# Altium PCB RL02.PcbDoc
Units mm, origin at the board's own origin, x right, y up, seen from the top; angles counter-clockwise.
Board outline 43 x 71 mm, 2 copper layers (Top Layer, Bottom Layer); 93 components, 57 nets, 282 pads, 132 vias.
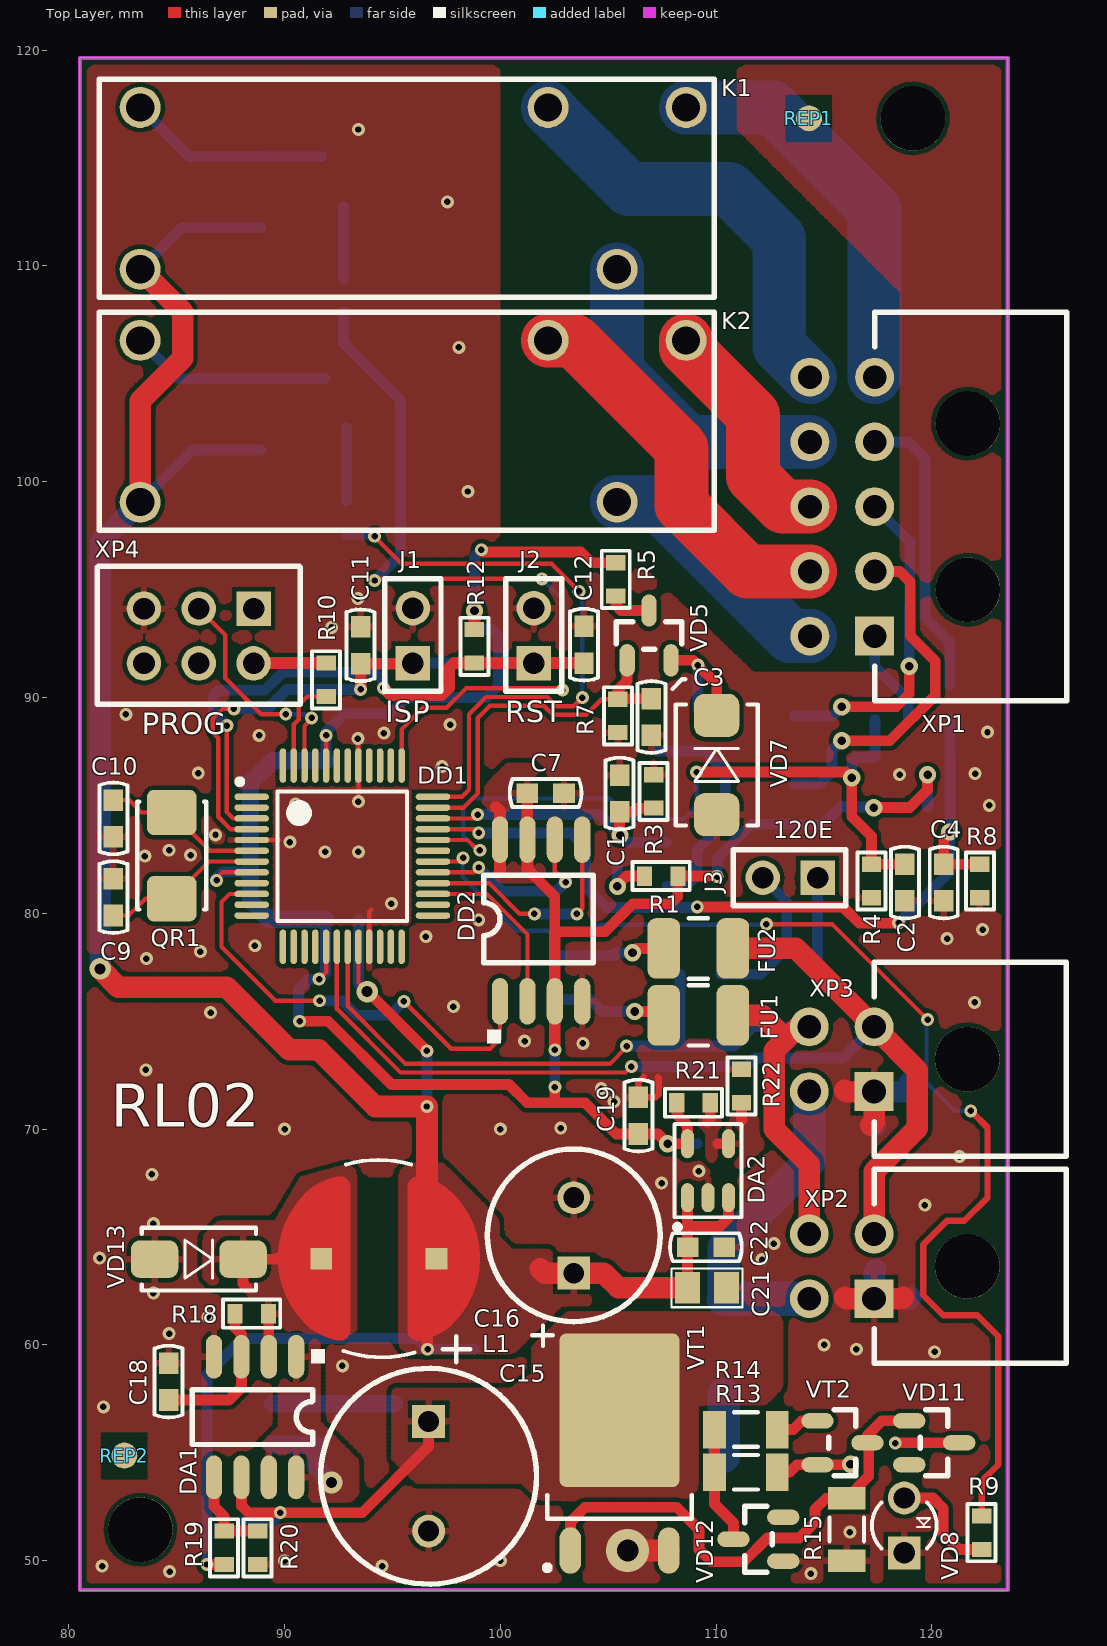
[diagram p0: Top Layer view]
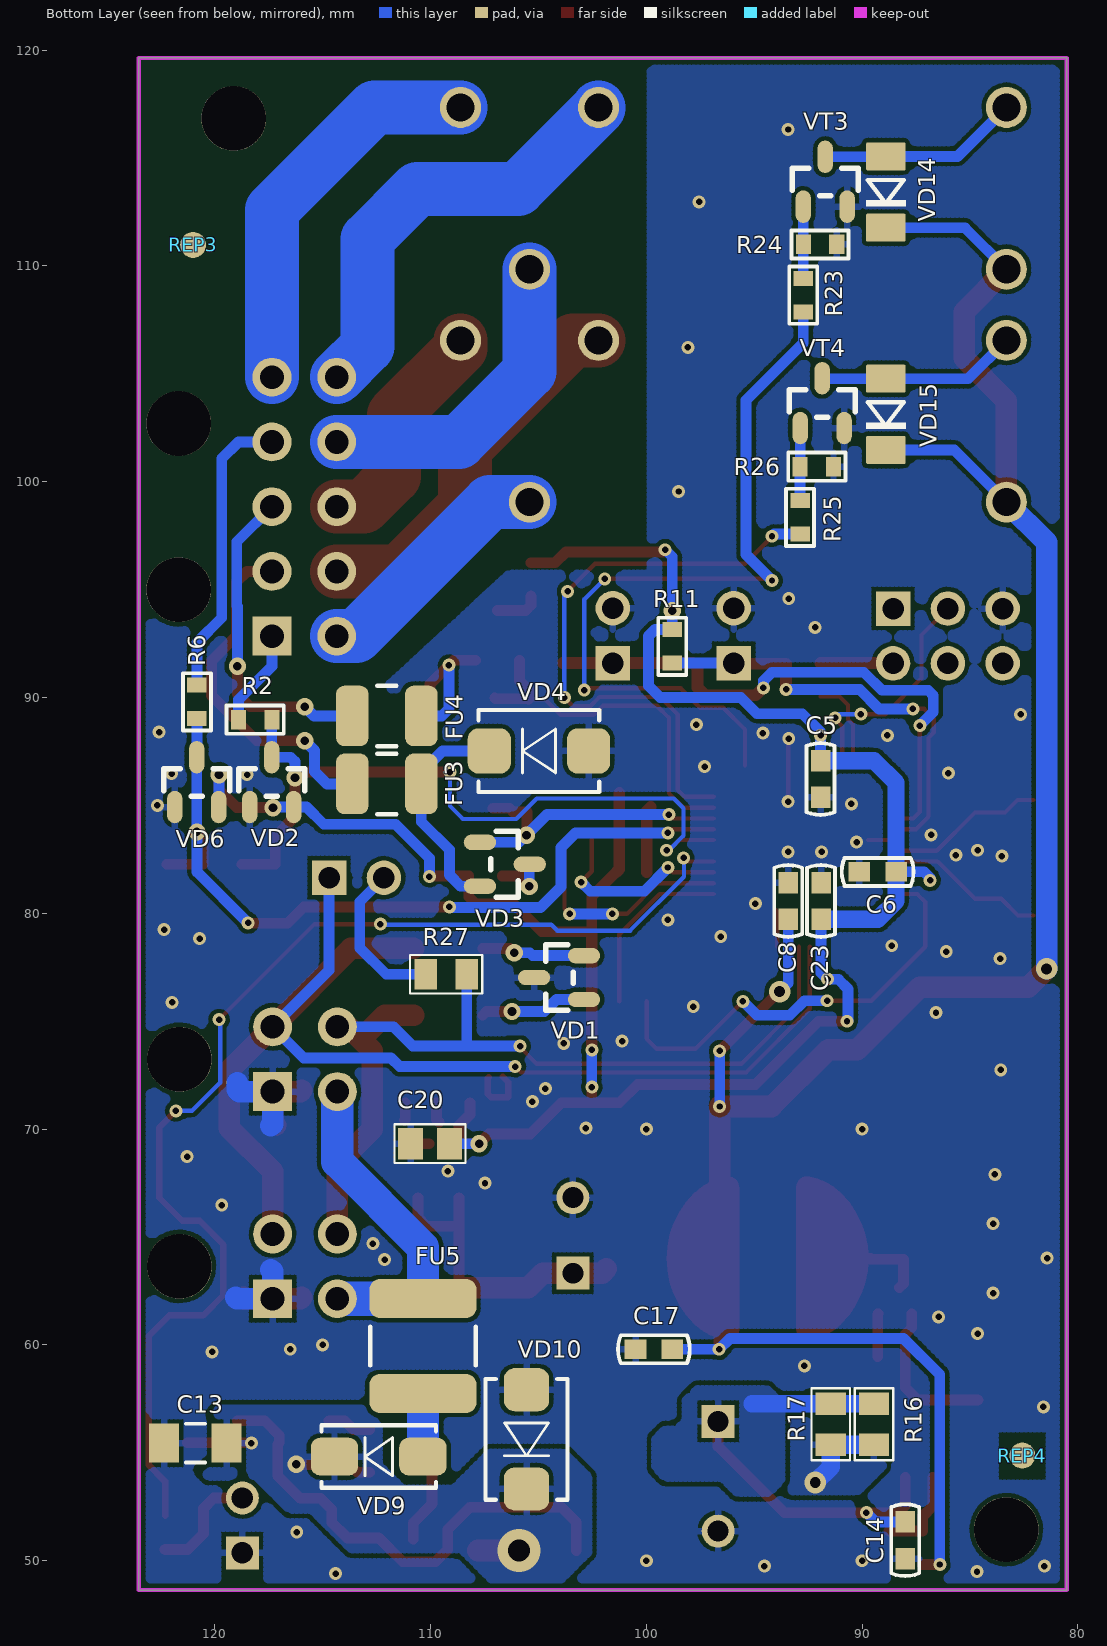
[diagram p1: Bottom Layer view, seen from below]

## Layer stack, top to bottom
Top Solder: solder mask 0.0102, Solder Resist, Dk 3.5
Top Layer: signal copper 0.0356
Dielectric 1: dielectric 0.32, FR-4, Dk 4.8
Bottom Layer: signal copper 0.0356
Bottom Solder: solder mask 0.0102, Solder Resist, Dk 3.5

## Board outline
80.518,48.641 80.518,119.641 123.518,119.641 123.518,48.641

## Design rules (kind name [scope] priority, off if disabled: settings)
Clearance [All] p1: gap=0.2 ignorepadtopadclearanceinfootprint=FALSE
HoleSize [All] p1: absolutevalues=TRUE maxlimit=7 minlimit=0.025 maxpercent=80.000 minpercent=20.000
MinimumSolderMaskSliver [All] p1: minsoldermaskwidth=0.1
PolygonConnect PolygonConnect_1 [IsVia OR InComponent('VT1') AND InNet('VIN_F')] p1: connectstyle=Direct reliefconductorwidth=0.254 reliefentries=4 polygonreliefangle="90 Angle" airgapwidth=0.254
PolygonConnect [All] p2: connectstyle=Relief reliefconductorwidth=0.3 reliefentries=4 polygonreliefangle="90 Angle" airgapwidth=0.2
RoutingVias [All] p1: holewidth=0.4 width=0.8 viastyle="Through Hole" minholewidth=0.3 minwidth=0.6 maxholewidth=1 maxwidth=2
SolderMaskExpansion [All] p1: expansion=0.102
Width [All] p1: maxlimit=3 minlimit=0.2 preferedwidth=0.5
28 further rules are at their usual default settings.

## Classes and differential pairs
component class Relays: K1 K2 R23 R24 R25 R26 VD14 VD15 VT3 VT4
component class Power: C13 C14 C15 C16 C17 C18 C19 C20 C21 C22 DA1 DA2 FU5 L1 R13 R14 R15 R16 R17 R18 R19 R20 R21 R22 VD9 VD10 VD11 VD12 VD13 VT1 VT2
component class MCU: C5 C6 C7 C8 C9 C10 C11 C12 C23 DD1 DD2 J1 J2 QR1 R9 R10 R11 R12 REP1 REP2 REP3 REP4 VD8 XP4
component class Inputs: C1 C2 C3 C4 FU3 FU4 R1 R2 R3 R4 R5 R6 R7 R8 VD2 VD3 VD4 VD5 VD6 VD7
component class Connections: FU1 FU2 J3 R27 VD1 XP1 XP2 XP3

## Components (designator, comment, footprint, x,y, rotation, side; value= is the part's Value field where it differs from the comment)
C1 "0.1uF" CC0603 105.525,85.55 r270 top
C2 "0.1uF" CC0603 118.75,81.425 r90 top
C3 "0.1uF" CC0603 107,89.1 r90 top
C4 "0.1uF" CC0603 120.55,81.425 r90 top
C5 "0.1uF" CC0603 91.925,86.225 r90 bottom
C6 "0.1uF" CC0603 89.275,81.925 r0 bottom
C7 "0.1uF" CC0603 102.1,85.575 r180 top
C8 "0.1uF" CC0603 93.425,80.577 r270 bottom
C9 "22pF" CC0603 82.069,80.75 r270 top
C10 "22pF" CC0603 82.069,84.4 r90 top
C11 "200pF" CC0603 93.525,92.425 r270 top
C12 "200pF" CC0603 103.875,92.45 r270 top
C13 "0.1uF" CC1206 120.9,55.45 r180 bottom
C14 "0.1uF" CC0603 88,50.95 r90 bottom
C15 "470uFx35V" CC16X10_CAP0.5(1)(Primary) 96.675,56.455 r270 top
C16 "1000uFx6.3V" CC8X3.5 103.4,63.325 r90 top
C17 "0.1uF" CC0603 99.65,59.8 r180 bottom
C18 "300pF" CC0603 84.625,58.3 r270 top
C19 "0.1uF" CC0603 106.4,70.625 r90 top
C20 "10uFx6.3V" CC0805 110.025,69.325 r180 bottom
C21 "4.7uF 6.3V" CC0805 109.575,62.65 r180 top
C22 "0.1uF" CC0603 109.525,64.525 r0 top
C23 "0.1uF" CC0603 91.9,80.575 r90 bottom
DA1 "MC34063" SO-8 90.54,59.45 r180 top
DA2 "AP2210K-ADJTRG1" SOT23-5 109.625,68.075 r90 top
DD1 "LPC11C24FBD48" LQFP-48 92.675,82.65 r0 top
DD2 "M25PE16" EIAJ_SO8 99.985,75.925 r90 top
FU1 "MICROSMD010F-2" RC1210 109.175,75.275 r0 top
FU2 "MICROSMD010F-2" RC1210 109.175,78.375 r0 top
FU3 "MICROSMD010F" RC1210 112.025,86 r180 bottom
FU4 "MICROSMD010F" RC1210 112.025,89.15 r180 bottom
FU5 "MF-SMDF050" MF-SMDF 110.35,59.95 r270 bottom
J1 "PLS-02" PLS-02 95.95,91.6 r90 top
J2 "PLS-02" PLS-02 101.55,91.6 r90 top
J3 "PLS-02" PLS-02 114.7,81.65 r180 top
K1 "RY21" RY21_RY21(Primary) 83.312,117.348 r0 top
K2 "RY21" RY21_RY21(Primary) 83.312,106.553 r0 top
L1 "220uH" SDR0805 94.375,64 r180 top
QR1 "NX5032GA-12.000MHz LN-CD-1" AC5032_2 84.769,82.675 r270 top
R1 "4k7" RC0603 107.45,81.725 r0 top
R2 "100k" RC0603 118.125,88.975 r180 bottom
R3 "100k" RC0603 107.1,85.65 r270 top
R4 "10k" RC0603 117.2,81.5 r90 top
R5 "4k7" RC0603 105.35,95.476 r90 top
R6 "100k" RC0603 120.825,89.8 r270 bottom
R7 "100k" RC0603 105.45,89.15 r90 top
R8 "10k" RC0603 122.225,81.5 r90 top
R9 "390E" RC0603 122.3,51.3 r270 top
R10 "100E" RC0603 91.925,90.825 r90 top
R11 "10k" RC0603 98.8,92.375 r90 bottom
R12 "10k" RC0603 98.8,92.375 r90 top
R13 "220k" RC1206 111.375,54.1 r0 top
R14 "220k" RC1206 111.375,56.075 r0 top
R15 "220k" RC1206 116.05,51.45 r270 top
R16 "1E" RC0805 89.45,56.325 r90 bottom
R17 "1E" RC0805 91.45,56.325 r90 bottom
R18 "560k" RC0603 88.475,61.45 r180 top
R19 "3k 1%" RC0603 87.2,50.6 r90 top
R20 "1k 1%" RC0603 88.75,50.6 r90 top
R21 "11k 1%" RC0603 108.95,71.225 r180 top
R22 "18k 1%" RC0603 111.175,72 r270 top
R23 "4k7" RC0603 92.725,108.65 r90 bottom
R24 "47k" RC0603 91.95,111 r0 bottom
R25 "4k7" RC0603 92.875,98.35 r90 bottom
R26 "47k" RC0603 92.1,100.7 r0 bottom
R27 "120E" RC0805 109.275,77.175 r180 bottom
REP1 "REPER_POINT_1.2" REPER1.2 114.3,116.84 r90 top
REP2 "REPER_POINT_1.2" REPER1.2 82.575,54.875 r90 top
REP3 "REPER_POINT_1.2" REPER1.2 121,110.975 r90 bottom
REP4 "REPER_POINT_1.2" REPER1.2 82.575,54.875 r90 bottom
VD1 "PESD2CAN" SOT-23(123) 102.876,76.009 r180 bottom
VD2 "BAT54S" SOT-23(GSD) 118.375,84.912 r180 bottom
VD3 "BAT54A" SOT-23(123) 107.724,83.291 r0 bottom
VD4 "P6SMBJ28A" SMB 104.975,87.525 r180 bottom
VD5 "BAT54A" SOT-23(123) 105.875,91.712 r270 top
VD6 "BAT54S" SOT-23(GSD) 121.85,84.912 r180 bottom
VD7 "P6SMBJ28A" SMB 110.025,86.875 r270 top
VD8 "BL-B45V1-L" LED3 118.718,50.366 r90 top
VD9 "GS1M" SMA 112.4,54.825 r0 bottom value={Value}
VD10 "SMBJ150A" SMB 105.55,55.625 r90 bottom
VD11 "BZX84C15" SOT-23(123) 118.937,56.482 r180 top value={Value}
VD12 "BZX84C39" SOT-23(123) 113.124,49.984 r0 top value={Value}
VD13 "SS14" SMA 86.025,63.975 r0 top
VD14 "LL4148" SOD-80 88.9,113.425 r90 bottom
VD15 "LL4148" SOD-80 88.9,103.126 r90 bottom
VT1 "FQD5P20TM" D-PAK(TO-252AA) 105.525,54.975 r90 top
VT2 "BC807-40" SOT-23(123) 114.687,56.482 r180 top
VT3 "BC817-40" SOT-23(123) 92.725,112.737 r270 bottom value={Value}
VT4 "BC817-40" SOT-23(123) 92.866,102.476 r270 bottom value={Value}
XP1 "MIF2X05PRP" MIF2X05PRP 117.346,92.846 r0 top
XP2 "MIF2X02PRP" MIF2X02PRP 117.318,62.141 r0 top
XP3 "MIF2X02PRP" MIF2X02PRP 117.318,71.741 r0 top
XP4 "PLD-06" PIN6 88.565,94.125 r180 top

## Footprints (in the part's own frame and the unit in brackets; to place one, negate y for a bottom-side part, rotate by r counter-clockwise, add the part's x,y. Pads: shape width x height; smd on the part's side, far side on the other; paste and mask are expansions set on the pad)
AC5032_2 [mm]
  rrect30% 2.1x2.3 smd mask+0.076: 1(-2,0) 2(2,0)
  silkscreen extent -2.5,-1.6 2.5,1.6
CC8X3.5 [mil]
  rect 60x60 hole 38 mask+2.99: 1(0,0)
  round 60 hole 38 mask+2.99: 2(137.8,0)
  silkscreen extent -89,-157 226,157
CC16X10_CAP0.5(1)(Primary) [mil]
  round 60 hole 38 mask+2.99: 1(200,0)
  rect 60x60 hole 38 mask+2.99: 2(0,0)
  silkscreen extent -97,-197 297,197
CC0603 [mm]
  rect 1x0.9 smd paste-25.4 mask+0.076: 1(-0.85,0) 2(0.85,0)
  silkscreen extent -1.66,-0.65 1.66,0.65
CC0805 [mm]
  rect 1.15x1.45 smd paste-25.4 mask+0.076: 1(-0.9,0) 2(0.9,0)
  silkscreen extent -1.65,-0.9 1.65,0.9
CC1206 [mm]
  rect 1.4x1.8 smd paste-25.4 mask+0.076: 1(-1.45,0) 2(1.45,0)
  silkscreen extent -0.45,-0.9 0.45,0.9
D-PAK(TO-252AA) [mm]
  oval 2.15x1 smd paste+0.076 mask+0.076: 1(-4.5,2.28) 3(-4.5,-2.28)
  rrect10% 7.1x5.55 smd paste-4 mask+0.076: 2(2,0)
  silkscreen extent -5.42,-3.35 -1.92,3.47
EIAJ_SO8 [mil]
  oval 85x29.53 smd mask+2.99: 1(0,0) 2(0,-50) 3(0,-100) 4(0,-150) 5(295,-150) 6(295,-100) 7(295,-50) 8(295,0)
  silkscreen extent -77,-170 230,30
LED3 [mil]
  rect 60x60 hole 39 mask+2.99: 1(0,0)
  round 60 hole 39 mask+2.99: 2(100,0)
  silkscreen extent 8,-59 92,59
LQFP-48 [mm]
  oval 1.6x0.3 smd mask+0.076: 1(-4.2,2.75) 2(-4.2,2.25) 3(-4.2,1.75) 4(-4.2,1.25) 5(-4.2,0.75) 6(-4.2,0.25) 7(-4.2,-0.25) 8(-4.2,-0.75) 9(-4.2,-1.25) 10(-4.2,-1.75) 11(-4.2,-2.25) 12(-4.2,-2.75) 25(4.2,-2.75) 26(4.2,-2.25) 27(4.2,-1.75) 28(4.2,-1.25) 29(4.2,-0.75) 30(4.2,-0.25) 31(4.2,0.25) 32(4.2,0.75) 33(4.2,1.25) 34(4.2,1.75) 35(4.2,2.25) 36(4.2,2.75)
  oval 0.3x1.6 smd mask+0.076: 13(-2.75,-4.2) 14(-2.25,-4.2) 15(-1.75,-4.2) 16(-1.25,-4.2) 17(-0.75,-4.2) 18(-0.25,-4.2) 19(0.25,-4.2) 20(0.75,-4.2) 21(1.25,-4.2) 22(1.75,-4.2) 23(2.25,-4.2) 24(2.75,-4.2) 37(2.75,4.2) 38(2.25,4.2) 39(1.75,4.2) 40(1.25,4.2) 41(0.75,4.2) 42(0.25,4.2) 43(-0.25,4.2) 44(-0.75,4.2) 45(-1.25,4.2) 46(-1.75,4.2) 47(-2.25,4.2) 48(-2.75,4.2)
  silkscreen extent -4.87,-3 3,3.57
MF-SMDF [mm]
  rrect50% 1.8x4.95 smd mask+0.076: 1(-2.2,0) 2(2.2,0)
  silkscreen extent -0.9,-2.45 0.9,2.45
MIF2X02PRP [mm]
  rect 1.8x1.8 hole 1.1 mask+0.076: 1(0,0)
  round 1.8 hole 1.1 mask+0.076: 2(0,3) 3(-3,0) 4(-3,3)
  round 3 hole 3 unplated mask+0.076: 5(4.32,1.5)
  silkscreen extent 0,-3 8.9,6
MIF2X05PRP [mm]
  rect 1.8x1.8 hole 1.1 mask+0.076: 1(0,0)
  round 1.8 hole 1.1 mask+0.076: 2(0,3) 3(0,6) 4(0,9) 5(0,12) 6(-3,0) 7(-3,3) 8(-3,6) 9(-3,9) 10(-3,12)
  round 3 hole 3 unplated mask+0.076: 11(4.32,2.15) 12(4.32,9.85)
  silkscreen extent 0,-3 8.9,15
PIN6 [mm]
  rect 1.6x1.6 hole 1 mask+0.076: 1(0,0)
  round 1.6 hole 1 mask+0.076: 2(0,2.54) 3(2.54,0) 4(2.54,2.54) 5(5.08,0) 6(5.08,2.54)
  silkscreen extent -2.16,-1.96 7.24,4.45
PLS-02 [mm]
  rect 1.6x1.6 hole 1 mask+0.076: 1(0,0)
  round 1.6 hole 1 mask+0.076: 2(2.54,0)
  silkscreen extent -1.3,-1.3 3.9,1.3
RC0603 [mm]
  rect 0.7x0.9 smd paste-25.4 mask+0.076: 1(-0.775,0) 2(0.774,0)
  silkscreen extent -1.32,-0.65 1.33,0.65
RC0805 [mm]
  rect 1.05x1.4 smd paste-25.4 mask+0.076: 1(-0.95,0) 2(0.95,0)
  silkscreen extent -1.67,-0.89 1.67,0.89
RC1206 [mm]
  rect 1.05x1.75 smd paste-25.4 mask+0.076: 1(-1.45,0) 2(1.45,0)
  silkscreen extent -0.55,-0.8 0.55,0.8
RC1210 [mm]
  rrect50% 1.5x2.8 smd mask+0.076: 1(-1.6,0) 2(1.6,0)
  silkscreen extent -0.45,-1.4 0.45,1.4
REPER1.2 [mm]
  round 1.2 smd paste-25.4 mask+0.076: 1(0,0)
  Top Layer pour cut-out: -1.35,-1.325 1.325,-1.325 1.325,1.325 -1.35,1.325
RY21_RY21(Primary) [mm]
  round 1.9 hole 1.3 mask+0.076: 1(0,-7.5) 2(0,0) 11(22.1,-7.5) 12(18.9,0) 14(25.3,0)
  silkscreen extent -1.9,-8.8 26.6,1.3
SDR0805 [mm]
  rect 1x1 smd paste-25.4 mask+0.076: 1(-2.667,0) 2(2.667,0)
  Top Layer region: -1.327,3.319 -1.362,3.503 -1.461,3.66 -1.612,3.771 -1.792,3.818 -1.977,3.797 -2.318,3.69 -2.706,3.535 -3.065,3.321 -3.387,3.053 -3.392,3.047 -3.771,2.627 -4.09,2.16 -4.345,1.654 -4.53,1.119 -4.642,0.565 -4.68,0 -4.642,-0.565 -4.53,-1.119 -4.345,-1.654 -4.09,-2.16 -3.771,-2.627 -3.392,-3.047 -3.381,-3.059 -3.063,-3.323 -2.709,-3.534 -2.325,-3.688 -1.996,-3.791 -1.806,-3.813 -1.62,-3.764 -1.465,-3.65 -1.363,-3.488 -1.327,-3.299
  Top Layer region: 1.327,-3.319 1.362,-3.503 1.461,-3.66 1.612,-3.771 1.792,-3.818 1.977,-3.797 2.318,-3.69 2.706,-3.535 3.065,-3.321 3.387,-3.053 3.392,-3.047 3.771,-2.627 4.09,-2.16 4.345,-1.654 4.53,-1.119 4.642,-0.565 4.68,0 4.642,0.565 4.53,1.119 4.345,1.654 4.09,2.16 3.771,2.627 3.392,3.047 3.381,3.059 3.063,3.323 2.709,3.534 2.325,3.688 1.996,3.791 1.806,3.813 1.62,3.764 1.465,3.65 1.363,3.488 1.327,3.299
  silkscreen extent -1.66,-4.57 1.64,4.57
SMA [mm]
  rrect50% 2.2x1.75 smd mask+0.076: 1(-2.05,0) 2(2.05,0)
  silkscreen extent -2.65,-1.45 2.65,1.45
SMB [mm]
  rrect50% 2x2.1 smd mask+0.076: 1(2.3,0) 2(-2.3,0)
  silkscreen extent -2.8,-1.9 2.8,1.9
SO-8 [mil]
  oval 29.53x80 smd mask+2.99: 1(0,0) 2(50,0) 3(100,0) 4(150,0) 5(150,220) 6(100,220) 7(50,220) 8(0,220)
  silkscreen extent -52,-14 190,160
SOD-80 [mm]
  rrect10% 1.3x1.83 smd paste-25.4 mask+0.076: 1(1.651,0) 2(-1.651,0)
  silkscreen extent -0.66,-0.91 0.56,0.91
SOT23-5 [mm]
  oval 1.35x0.6 smd mask+0.076: 1(-1.25,0.95) 2(-1.25,0) 3(-1.25,-0.95) 4(1.25,-0.95) 5(1.25,0.95)
  silkscreen extent -2.74,-1.55 2.16,1.55
SOT-23(123) [mil]
  oval 59.06x28.07 smd mask+2.99: 1(-0.5,0) 2(-0.5,80) 3(-91.5,40)
  silkscreen extent -70,-20 -20,100
SOT-23(GSD) [mil]
  oval 28.07x59.06 smd mask+2.99: 1(0,0.5) 2(80,0.5) 3(40,91.5)
  silkscreen extent -20,20 100,70

## Part data
C1 C2 C3 C4 C5 C6 C7 C8 C9 C10 C11 C12 C14 C17 C18 C19 C22 C23: library part CC0603, "CC0603"
C13: library part CC1206, "CC1206"
C15: library part CAP0.5(1), "CAP0.5(1)"
C16: library part CAP0.35, "CAP0.35"
C20 C21: library part CC0805, "CC0805"
DA2: library part MCP1824T-ADJE/OT, "300 mA, Low Voltage, Low Quiescent Current LDO Regulator, 5-Pin SOT-223, Extended Temperature, Tape and Reel", ComponentLink1Description="Manufacturer Link", ComponentLink1URL=http://www.microchip.com, ComponentLink2Description=Datasheet, ComponentLink2URL=http://ww1.microchip.com/downloads/en/DeviceDoc/22070a.pdf, ComponentLink3Description="Packaging Specification", ComponentLink3URL=http://ww1.microchip.com/downloads/en/PackagingSpec/00049AW.pdf, DatasheetVersion="revA, Aug-2007", PackageDescription="5-Lead Plastic Small Outline Transistor (DC) [SOT-223]", PackageReference=SOT-223-DC5, PackageVersion="revAW, Oct-2008", Published=29-Jan-2009, Publisher="Altium Limited"
DD2: library part S25FL016A0LMFI01, "S25FL016A0LMFI01"
FU1 FU2 FU3 FU4: library part MICROSMD, "MICROSMD"
FU5: library part MF-SMDF, "MF-SMDF"
L1: library part SDR0805, "SDR0805"
QR1: library part AC5032_2, "AC5032/2"
R1 R2 R3 R4 R5 R6 R7 R8 R9 R10 R11 R12 R18 R19 R20 R21 R22 R23 R24 R25 R26: library part RC0603, "RC0603"
R13 R14 R15: library part RC1206, "RC1206"
R16 R17 R27: library part RC0805, "RC0805"
REP1 REP2 REP3 REP4: library part REPER1.2, "REPER1.2"
VD1: "TVS for CAN"
VD2 VD3 VD5 VD6: "1.0 Ampere General Purpose Rectifier", ComponentField6="Published 8-Jun-2000, Modified 11-July-2000: SIM Model Added."
VD4 VD7 VD10: library part SMBJ, "SMBJ"
VD8: library part LED_3, "LED_3"
VD11 VD12: library part BZX84, "Zener Voltage Regulator Diode"
VD13: "Schottky Rectifier", ComponentField6="Published 8-Jun-2000, Modified 10-July-2000: SIM Model Added.", OriginalName=10BQ100
VT1: library part IRFR9220, "HEXFET Power MOSFET", ComponentField7="Published 8-Jun-2000", OriginalName=IRLML5103
VT2: library part BC857B, "BC857B", ComponentField7="Published 29-Sep-2000", OriginalName=BC846BLT1
VT3 VT4: library part BC846BLT1, "BC846BLT1", ComponentField7="Published 29-Sep-2000", OriginalName=BC846BLT1
XP4: "PLD06"

## Free pads (board coordinates)
  round 3 hole 3 mask+0.076: 0(83.318,51.441) 0(119.118,116.841)

## Via types
v1: diameter 0.6, hole 0.3, Top Layer to Bottom Layer, 114 vias
v2: diameter 0.8, hole 0.4, Top Layer to Bottom Layer, 14 vias
v3: diameter 1, hole 0.5, Top Layer to Bottom Layer, 3 vias
v4: diameter 2, hole 1, Top Layer to Bottom Layer, 1 vias

## Nets (pads, with @x,y where several pads share a name; then routed paths per layer and width w, separated by ;. In a path a pad name is that pad's centre, name@x,y a point inside that pad or via, vN(x,y) a via of type N, cw(c..) or ccw(c..) an arc to the next point about the centre after c; other vN are vias at no path point)
+3V3: C5.2 C6.1 C7.2 C19.1 C20.2 C23.1 DA2.5 DD1.8 DD1.17 DD1.44 DD2.3 DD2.7 DD2.8 R1.2 R5.2 R11.2 R12.2 R21.2 VD2.2 VD6.2 | length 115.5
  Top Layer w0.2: v1(86.85,81.525) 86.85,81.65 87.1,81.9 DD1.8 ; v1(91.6,76.95) 91.925,77.275 DD1.17 ; DD1.44 v1(91.925,88.25)
  Top Layer w0.5: v1(90.7,75) 92.025,75 94.95,72.075 100.4,72.075 101.25,71.225 102.475,71.225 ; v1(99.125,96.85) 99.225,96.75 103.725,96.75 104.225,96.25 R5.2 ; 101.4,81.901 102.525,80.776 102.525,79.15 104.85,79.15 106.15,80.45 107.9,80.45 108.224,80.774 R1.2 v1@110.05,81.725 ; v1(102.525,71.95) 102.525,71.275 102.475,71.225 ; R21.2 108.176,70.674 108.675,70.175 DA2.5 v2(107.75,69.325) 107.3,69.775 C19.1 105.375,69.775 103.925,71.225 102.475,71.225 ; v2(117.3,84.9) 118.975,84.9 119.8,85.725 v2(119.8,86.425)
  Top Layer w0.54: R12.2 v2(98.8,94.025) ; 99.8,84.926 99.985,84.741 DD2.8 99.985,81.903 ; C7.2 101.25,83.423 DD2.7 101.255,82.046 101.4,81.901 ; v1(102.525,73.675) DD2.3 102.525,79.15
  Bottom Layer w0.5: v1(86.85,81.525) 86.85,81.65 87.125,81.925 C6.1 ; v1(90.7,75) 90.65,75.05 90.65,76.5 91.1,76.95 v1(91.6,76.95) 91.9,77.25 C23.1 ; C5.2 v1(91.925,88.25) 91.925,88.4 92.775,89.25 94.875,89.25 95.625,90 99.35,90 99.9,90.55 99.9,92.85 99.601,93.149 R11.2 v2(98.8,94.025) 98.8,96.525 v1(99.125,96.85) ; v1(102.525,71.95) v1(102.525,73.675) ; v2(107.75,69.325) C20.2 ; v1(110.05,81.7) 110.05,82.55 111.625,84.125 114.95,84.125 115.75,84.925 VD2.2 117.275,84.925 v2(117.3,84.9) ; v2(119.8,86.425) 119.8,84.943 VD6.2
  Bottom Layer w0.8: C23.1 89.275,79.725 88.425,80.575 C6.1 88.425,86.05 89.45,87.075 C5.2
+5V: C8.2 C16.1 C17.2 C21.2 C22.1 DA2.1 DA2.3 DD1.20 K1.1 K2.1 L1.1 R19.1 VD14.2 VD15.2 | length 121.2
  Top Layer w0.2: DD1.20 93.425,76.8 v3@94,76.225
  Top Layer w0.5: v3@81.375,77.3 81.375,77.35 v3(81.45,77.425) ; v1(86.4,49.825) R19.1 ; v3@94,76.225 v1(96.6,73.625) ; 96.6,66.925 96.6,66.575 96.8,66.375 ; v1(96.625,59.8) 96.625,61 ; C21.2 C22.1 108.675,65.5 ; DA2.1 108.675,65.5 ; DA2.3 110.575,65.9 110.175,65.5 108.675,65.5
  Top Layer w1: v3(81.45,77.425) 82.3,76.575 87.325,76.575 90.225,73.675 91.575,73.675 94.2,71.05 v1(96.6,71.05) 96.6,66.925 ; K2.1 83.312,103.762 85.275,105.725 85.275,107.885 K1.1 ; 101.85,63.525 102.05,63.325 C16.1 104.8,63.325 105.475,62.65 C21.2
  Bottom Layer w0.5: K2.1 85.734,101.475 VD15.2 ; K1.1 85.238,111.774 VD14.2 ; v1(86.4,49.825) 86.4,58.625 88.075,60.3 96.125,60.3 v1(96.625,59.8) C17.2 ; C8.2 93.425,76.775 v3(93.825,76.375) ; v1(96.6,71.05) v1(96.6,73.625)
  Bottom Layer w1: v3(81.45,77.425) 81.45,97.191 K2.1
Analog1: R2.1 XP1.1 | length 4.5
  Bottom Layer w0.5: XP1.1@117.35,92.842 XP1.1 117.346,91.454 118.9,89.9 R2.1
ANALOG1_F: C2.2 DD1.32 R2.2 R4.2 VD2.3 | length 34.8
  Top Layer w0.2: DD1.32 98.476,83.4 98.951,82.925 v1(99.056,82.925)
  Top Layer w0.5: v1(109.1,86.55) 116.01,86.55 v2(116.281,86.279) 116.281,84.494 117.2,83.575 R4.2 C2.2@118.749,82.274
  Bottom Layer w0.2: v1(99.056,82.925) 98.951,82.925 98.275,83.601 98.275,84.875 98.725,85.325 105.075,85.325 106.025,84.375 108.5,84.375 109.1,84.975 v1(109.1,86.55)
  Bottom Layer w0.5: v2(116.281,86.279) 116.281,87.031 116.486,87.236 VD2.3 117.359,88.967 R2.2
Analog2: R6.1 XP1.4 | length 13.6
  Bottom Layer w0.5: XP1.4 118.904,101.846 119.675,101.075 119.675,93.7 120.825,92.55 R6.1
ANALOG2_F: C4.2 DD1.33 R6.2 R8.2 VD6.3 | length 38.2
  Top Layer w0.2: DD1.33 98.825,83.9 v1(99,83.725)
  Top Layer w0.5: v1(109.125,80.3) 115.875,80.3 116.631,79.544 v1@118.456,79.544 ; v2(120.825,83.775) 120.55,83.5 C4.2 R8.2@122.224,82.275
  Bottom Layer w0.5: v1(99,83.725) 103.275,83.725 103.95,83.05 103.95,81.225 104.9,80.275 109.1,80.275 v1(109.125,80.3) ; v1(118.456,79.554) 120.825,81.923 v2(120.825,83.775) 120.834,83.784 VD6.3 120.825,87.245 R6.2
CAN_LED: DD1.30 R9.1 | length 55.9
  Top Layer w0.2: DD1.30 98.1,82.4 v1(98.275,82.575) ; v1(112.325,79.5) 115.375,79.5 v1(119.8,75.075)
  Top Layer w0.3: v1(121.8,70.85) 122.575,70.075 122.575,66.825 121.5,65.75 120.7,65.75 119.6,64.65 119.6,62.3 120.525,61.375 122.1,61.375 123.068,60.407 123.068,54.443 122.3,53.675 R9.1
  Bottom Layer w0.2: v1@98.25,82.55 98.25,81.7 100.75,79.2 104.125,79.2 104.4,79.475 112.3,79.475 v1(112.325,79.5) ; v1(119.8,75.075) 119.75,75.025 119.75,72.15 121.05,70.85 v1(121.8,70.85)
  Bottom Layer w0.5: v1@98.25,82.55 v1(98.275,82.575)
CANH: FU1.1 VD1.1 | length 5
  Top Layer w0.5: v2(106.225,75.45) 107.4,75.45 FU1.1
  Bottom Layer w0.5: VD1.1 104.166,76.009 104.725,75.45 v2(106.225,75.45)
CANL: FU2.1 VD1.2 | length 4.8
  Top Layer w0.5: v2(106.125,78.175) 106.325,78.375 FU2.1
  Bottom Layer w0.5: VD1.2 105.266,78.041 105.4,78.175 v2(106.125,78.175)
GND: C1.1 C2.1 C3.1 C4.1 C5.1 C6.2 C7.1 C8.1 C9.1 C10.1 C11.1 C12.1 C13.1 C14.1 C15.1 C16.2 C17.1 C18.1 C19.2 C20.1 C21.1 C22.2 C23.2 DA1.4 DA2.2 DD1.5 DD1.21 DD1.41 DD2.4 J1.2 J2.2 R3.1 R4.1 R7.1 R8.1 R15.2 R20.1 R22.1 R24.1 R26.1 VD1.3 VD2.1 VD4.1 VD6.1 VD7.1 VD8.1 VD10.1 VD12.1 VD13.1 VT3.2 VT4.2 XP2.1 XP3.1 XP4.5 | length 21.3
  Top Layer w0.2: DD1.5 89.725,83.4 ; v1(93.4,88.099) 93.425,88.074 DD1.41 v1(93.425,85.175) ; DD1.21 93.925,80.075 94.025,80.175
  Top Layer w0.3: 106.655,72.425 106.4,72.17 C19.2 107.2,71.475 107.35,71.625 107.35,72.35 107.3,72.4
  Top Layer w1: 115.968,62.2 116.027,62.141 XP2.1 118.609,62.141 118.668,62.2 ; 115.968,71.8 116.027,71.741 XP3.1 117.318,70.318 117.175,70.175
  Bottom Layer w1: 117.4,63.491 117.318,63.409 XP2.1 118.966,62.141 119.025,62.2 ; 117.4,70.15 117.318,70.232 XP3.1 118.872,71.741 118.95,71.819 118.95,72.15
  other v1: 114.393,49.4 84.675,49.5 81.55,49.75 94.525,49.75 90,50 100,50 116.2,51.325 81.6,57.125 92.675,59.025 120.125,59.675 116.5,59.8 115,60 84.65,60.525 86.45,61.3 83.925,62.4 112.125,63.95 81.425,64.025 112.675,64.7 83.925,65.625 119.675,66.475 107.475,67.5 83.85,67.9 109.2,68.053 121.275,68.725 90,70 100,70 102.8,70.05 105.275,71.275 104.675,71.875 83.575,72.75 103.825,73.975 101.125,74.075 86.575,75.4 97.825,75.675 121.975,75.875 83.6,77.9 86.1,78.225 88.625,78.5 120.7,78.825 96.55,78.925 122.35,79.25 99,79.7 94.95,80.45 83.525,82.65 85.65,82.7 91.875,82.85 93.425,82.85 84.65,82.925 90.25,83.3 86.8,83.636 122.657,85 90.5,85.075 118.5,86.425 122,86.475 86,86.5 97.3,86.8 88.825,88.25 94.6,88.35 122.575,88.4 97.675,88.75 82.65,89.225 92.175,93.25 93.4,94.588 98.5,99.55 98.075,106.225 97.55,112.975 93.425,116.325
ISP_Start: C11.2 DD1.4 J1.1 R11.1 | length 20.3
  Top Layer w0.2: v1(87.65,89.475) 87.125,89.475 86.675,89.025 86.675,88.375 86.925,88.125 86.925,84.475 87.5,83.9 DD1.4
  Top Layer w0.54: v1(93.525,90.375) C11.2 95.925,91.575 J1.1
  Bottom Layer w0.5: v1(87.65,89.475) 89.213,89.475 90.113,90.375 v1(93.525,90.375) ; J1.1 R11.1
MISO0: DD1.27 DD2.2 | length 8.3
  Top Layer w0.2: DD1.27 99.375,80.9 101.255,79.02 DD2.2
MOSI0: DD1.28 DD2.5 | length 10.8
  Top Layer w0.2: DD1.28 99.475,81.4 100.9,79.975 v1(101.575,79.975) ; v1(103.55,79.975) 103.795,80.22 DD2.5
  Bottom Layer w0.5: v1(101.575,79.975) v1(103.55,79.975)
NetC13_2: C13.2 R13.2 VD9.2 VD10.2 VD11.3 VT1.3 VT2.2 | length 8.4
  Top Layer w0.5: R13.2 113.4,54.1 113.75,54.45 VT2.2 116.2,54.45 v2(116.225,54.475) ; v1(118.3,55.45) 118.316,55.466 VD11.3
  Top Layer w1: v4(105.9,50.475) VT1.3
NetC18_2: C18.2 DA1.3 R18.2 | length 7.2
  Top Layer w0.5: C18.2 87.425,57.45 88,58.025 DA1.3 88,60.5 87.701,60.799 R18.2
NetDA1_1: DA1.1 DA1.7 DA1.8 R16.1 R17.1 | length 4.1
  Bottom Layer w0.85: R16.1 R17.1 91.45,54.35 v3(92.175,53.625)
NetDA1_2: DA1.2 L1.2 R18.1 VD13.2 | length 5
  Top Layer w0.5: 88.275,62.65 88.075,62.85 VD13.2 89.6,63.975 89.625,64 ; R18.1 89.27,61.43 DA1.2
NetDA1_5: DA1.5 R19.2 R20.2 | length 4.2
  Top Layer w0.5: DA1.5 86.73,52.52 87.2,52.05 R19.2 R20.2
NetDA2_4: DA2.4 R21.1 R22.2 | length 2.3
  Top Layer w0.5: 109.6,70.325 109.725,70.45 R21.1 ; 110.075,69.325 DA2.4 ; R22.2 111.175,70.45 111.2,70.426
NetDD1_10: DD1.10 DD2.1 | length 21
  Top Layer w0.2: DD1.10 87.45,80.9 87.075,80.525 87.075,78.45 89.575,75.95 v1(91.625,75.95) ; v1(95.525,75.925) 97.725,73.725 99.525,73.725 99.985,74.185 DD2.1
  Bottom Layer w0.5: v1(91.625,75.95) 92.675,75.95 93.35,75.275 94.875,75.275 v1(95.525,75.925)
NetDD1_18: DD1.18 FU2.2 J3.1 XP2.2 XP3.2 | length 57.2
  Top Layer w0.2: DD1.18 92.425,75.575 95.375,72.625 105.8,72.625 v1(106.075,72.9)
  Top Layer w1: FU2.2 113.684,78.375 XP3.2 119.325,72.734 119.325,70.05 117.318,68.043 XP2.2
  Bottom Layer w0.5: v1(106.075,72.9) 111.425,72.9 111.825,73.3 115.877,73.3 XP3.2 114.7,77.359 J3.1
NetDD1_19: DD1.19 FU1.2 R27.2 XP2.4 XP3.4 | length 43.5
  Top Layer w0.2: DD1.19 92.925,75.7 95.6,73.025 105.075,73.025 105.85,73.8 v1(105.85,73.85)
  Top Layer w1: FU1.2 112.125,75.275 113.237,74.162 ; XP2.4 114.318,68.382 112.7,70 112.7,73.625 113.237,74.162 ; XP3.4 113.816,74.741 113.237,74.162
  Bottom Layer w0.5: v1(105.85,73.85) 108.325,73.85 ; R27.2 108.325,73.85 ; XP3.4 111.716,74.741 110.825,73.85 108.325,73.85
NetFU3_2: FU3.2 VD3.2 VD4.2 | length 10.5
  Bottom Layer w0.5: VD4.2 109.45,87.525 110.425,86.55 FU3.2 110.425,84.25 109.125,82.95 109.125,81.775 108.609,81.259 VD3.2
NetFU4_2: FU4.2 VD5.2 VD7.2 | length 7.5
  Top Layer w0.5: VD5.2 108.925,91.725 v1(109.15,91.5) 110.025,90.625 VD7.2
  Bottom Layer w0.5: v1(109.15,91.5) 109.15,89.475 109.475,89.15 FU4.2
NetFU5_2: FU5.2 VD9.1 | length 2.9
  Bottom Layer w1.5: VD9.1 FU5.2
NetJ3_2: J3.2 R27.1 | length 7.3
  Bottom Layer w0.5: R27.1 112.05,77.175 113.275,78.4 113.275,80.535 J3.2
NetK1_2: K1.2 VD14.1 VT3.3 | length 9.3
  Bottom Layer w0.5: K1.2 85.584,115.076 VD14.1 88.915,115.061 VT3.3
NetK2_2: K2.2 VD15.1 VT4.3 | length 9.3
  Bottom Layer w0.5: K2.2 85.088,104.777 VD15.1 91.827,104.777 VT4.3
NetR1_1: R1.1 VD3.3 | length 2.5
  Top Layer w0.5: v2(105.425,81.25) 105.4,81.275 105.85,81.725 R1.1
  Bottom Layer w0.5: VD3.3 105.425,82.25 v2(105.425,81.25)
NetR5_1: R5.1 VD5.3 | length 2.1
  Top Layer w0.5: R5.1 105.35,94.275 105.589,94.036 VD5.3
NetR9_2: R9.2 VD8.2 | length 5.3
  Top Layer w0.5: VD8.2 120.044,52.906 120.525,52.425 120.525,51.25 121.249,50.526 R9.2
NetR10_2: R10.2 XP4.2 | length 3.4
  Top Layer w0.54: XP4.2 88.579,91.599 R10.2
NetR13_1: R13.1 R14.1 VD12.3 | length 5.4
  Top Layer w0.5: R14.1 R13.1 109.925,52.625 110.8,51.75 VD12.3
NetR14_2: R14.2 VT2.1 | length 2
  Top Layer w0.5: R14.2 113.575,56.075 113.982,56.482 VT2.1
NetR15_1: R15.1 VD11.1 VT1.1 VT2.3 | length 23.1
  Top Layer w0.5: VT1.1 103.245,51.795 103.925,52.475 108.175,52.475 109.2,51.45 109.2,50.525 109.775,49.95 111.284,49.95 112.384,51.05 113.85,51.05 114.575,51.775 114.575,52.375 115.1,52.9 R15.1 117.075,53.925 117.075,55.402 VT2.3 117.011,55.809 117.684,56.482 VD11.1
NetR23_2: R23.2 R24.2 VT3.1 | length 3.3
  Bottom Layer w0.5: R23.2 VT3.1
NetR25_2: R25.2 R26.2 VT4.1 | length 3.4
  Bottom Layer w0.5: VT4.1 92.866,100.708 R26.2 R25.2@92.874,99.125
RELAY1: DD1.37 R23.1 | length 37.3
  Top Layer w0.2: v1@94.175,95.5 v1(101.925,95.5) ; DD1.37 95.425,88.525 96.43,89.53 97.511,89.53 98.406,90.425 102.8,90.425 v1(102.875,90.35)
  Bottom Layer w0.2: v1(101.925,95.5) 102.875,94.55 v1(102.875,90.35)
  Bottom Layer w0.5: R23.1 92.725,106.425 95.375,103.775 95.375,96.625 v1(94.175,95.425)
Relay1_Main: K1.11 XP1.9 | length 15
  Bottom Layer w2.5: K1.11 105.412,105.113 108.679,101.846 XP1.9
Relay1_R: K1.14 XP1.5 | length 18.5
  Bottom Layer w2.5: K1.14 112.602,117.348 117.346,112.604 XP1.5
Relay1_Z: K1.12 XP1.10 | length 20.3
  Bottom Layer w2.5: K1.12 102.212,117.313 105.95,113.575 110.6,113.575 112.925,111.25 112.925,106.267 XP1.10
RELAY2: DD1.36 R25.1 | length 28.1
  Top Layer w0.2: v1@94.175,97.45 95.425,96.2 102.375,96.2 v1(103.65,94.925) ; DD1.36 98.225,85.4 98.55,85.725 98.55,89.225 99.35,90.025 102.175,90.025 102.6,89.6 103.4,89.6 v1(103.8,90)
  Bottom Layer w0.2: v1(103.65,94.925) 103.8,94.775 v1(103.8,90)
  Bottom Layer w0.5: R25.1 94.075,97.575 v1(94.175,97.475)
Relay2_Main: K2.11 XP1.6 | length 11.5
  Bottom Layer w2.5: K2.11 107.247,99.053 113.454,92.846 XP1.6
Relay2_R: K2.14 XP1.8 | length 10.8
  Top Layer w2.5: K2.14 108.612,106.188 111.7,103.1 111.7,100.25 113.104,98.846 XP1.8
Relay2_Z: K2.12 XP1.7 | length 18.1
  Top Layer w2.5: K2.12 103.397,106.553 108.4,101.55 108.4,98.9 111.454,95.846 XP1.7
RESET: C12.2 DD1.3 J2.1 R12.1 | length 26.4
  Top Layer w0.2: v1(87.325,88.7) 87.325,84.7 87.625,84.4 DD1.3
  Top Layer w0.54: v1(94.575,90.45) 94.925,90.1 97.275,90.1 97.625,90.45 97.625,91.375 97.85,91.6 R12.1 J2.1 C12.2
  Bottom Layer w0.5: v1(87.325,88.7) 86.7,89.325 86.7,90.1 86.935,90.335 89.083,90.335 89.923,91.175 94.175,91.175 94.575,90.775 v1(94.575,90.45)
RXD: DD1.46 XP4.3 | length 10.8
  Top Layer w0.2: XP4.3 87.25,92.9 87.25,90.9 88.921,89.229 v1(90.054,89.229) ; DD1.46 90.925,88.686 91.254,89.015 v1(91.254,89.054)
  Bottom Layer w0.2: v1(90.054,89.229) 91.079,89.229 v1(91.254,89.054)
SCK0: DD1.29 DD2.6 | length 9
  Top Layer w0.2: DD1.29 98.775,81.9 v1(99,82.125) ; DD2.6 102.525,81.95 v1(103.025,81.45)
  Bottom Layer w0.5: v1(99,82.125) 100.1,81.025 102.6,81.025 v1(103.025,81.45)
Sense1: FU3.1 XP1.2 | length 16.4
  Top Layer w0.5: v2(115.825,88) 118.05,88 120.15,90.1 120.15,91.7 119,92.85 119,95.35 118.504,95.846 XP1.2
  Bottom Layer w0.5: FU3.1 114.8,86 115.375,86.575 115.375,87.55 v2(115.825,88)
SENSE1_F: C1.2 DD1.34 R3.2 VD3.1 | length 14.2
  Top Layer w0.2: DD1.34 98.775,84.4 v1(98.95,84.575)
  Top Layer w0.5: v2(105.55,83.625) 105.525,83.65 C1.2 106.15,84.7 106.326,84.876 R3.2
  Bottom Layer w0.5: v1(98.95,84.575) 104.6,84.575 v2(105.55,83.625) 105.884,83.291 VD3.1
Sense2: FU4.1 XP1.3 | length 15.1
  Top Layer w0.5: v2(115.825,89.575) 118.35,89.575 118.95,90.175 v2(118.95,91.45)
  Bottom Layer w0.5: FU4.1 115.4,89.15 v2(115.825,89.575) ; XP1.3 118.975,97.217 118.975,94.25 118.95,94.225 v2(118.95,91.45)
SENSE2_F: C3.2 DD1.35 R7.2 VD5.1 | length 16.6
  Top Layer w0.2: DD1.35 98.291,84.9 98.95,85.559 98.95,89.059 99.516,89.625 102.009,89.625 102.434,89.2 103.975,89.2 104.699,89.924 R7.2
  Top Layer w0.5: R7.2 105.45,90.35 105.875,90.775 VD5.1 ; R7.2@105.476,89.95 C3.2 C3.2@107.025,89.975
TXD: DD1.47 R10.1 | length 4.3
  Top Layer w0.2: DD1.47 90.425,88.751 90.654,88.981 90.654,89.654 91.05,90.05 R10.1
VIN: FU5.1 XP2.3 XP3.3 | length 15.2
  Bottom Layer w1.5: FU5.1 110.35,64.525 114.318,68.493 XP3.3
  Bottom Layer w1.6: FU5.1 114.309,62.15 XP2.3
VIN_F: C14.2 C15.2 DA1.6 R16.2 R17.2 VT1.2 | length 20.2
  Top Layer w0.5: DA1.6 88,52.55 88.325,52.225 v1(89.8,52.225) 93.6,52.225 96.675,55.3 C15.2
  Bottom Layer w0.5: C14.2 89.375,51.8 v1(89.8,52.225)
  Bottom Layer w0.8: R16.2 R17.2 95.1,57.275
XTALIN: C10.2 DD1.6 QR1.1 | length 7.4
  Top Layer w0.2: C10.2 82.8,85.25 83.375,84.675 QR1.1 86.544,82.9 DD1.6
XTALOUT: C9.2 DD1.7 QR1.2 | length 7.4
  Top Layer w0.2: C9.2 82.775,79.9 83.55,80.675 QR1.2 86.494,82.4 DD1.7
pads on no net: DD1.1 DD1.2 DD1.9 DD1.11 DD1.12 DD1.13 DD1.14 DD1.15 DD1.16 DD1.22 DD1.23 DD1.24 DD1.25 DD1.26 DD1.31 DD1.38 DD1.39 DD1.40 DD1.42 DD1.43 DD1.45 DD1.48 REP1.1 REP2.1 REP3.1 REP4.1 VD11.2 VD12.2 XP1.11 XP1.12 XP2.5 XP3.5 XP4.1 XP4.4 XP4.6

## Polygon pours and split planes (outlines as drawn)
GND on Top Layer "GND_L01_P046" (hatched 90Degree grid 0.2 track 0.5, remove dead copper, pour order 46): 80.518,119.6 80.559,119.641 123.518,119.641 123.518,48.641 80.518,48.641
NetC13_2 on Top Layer "NETC13_2_L01_P016" (hatched 90Degree grid 0.2 track 0.5, remove dead copper, pour order 16): 108.1,52.05 108.8,51.35 108.8,48.641 104.434,48.641 104.05,49.025 104.05,51.575 104.525,52.05
VIN_F on Top Layer "VIN_F_L01_P020" (hatched 90Degree grid 0.2 track 0.5, remove dead copper, pour order 20): 103.325,53 108.5,53 109.075,53.575 109.075,57.1 109.425,57.45 112.225,57.45 112.875,58.1 112.875,61.1 112.65,61.325 103.175,61.325 101.675,59.825 101.675,58.55 100.525,57.775 95.175,57.775 95.175,56.5 95.175,54.8 96.175,53.8 101.075,53.8 101.85,53.025 101.975,53.025
NetDA1_2 on Top Layer "NETDA1_2_L01_P034" (hatched 90Degree grid 0.2 track 0.5, remove dead copper, pour order 34): 88.475,61.225 88.475,62.45 88.125,62.8 86.825,62.8 86.425,63.2 86.425,64.95 87.025,65.55 89.675,65.55 90.875,67.6 92.925,68.15 93.475,67.6 93.425,60.701 93.048,60.701 92.175,60.75 90.925,60.75 88.7,60.75 88.45,61
+5V on Top Layer "+5V_L01_P036" (hatched 90Degree grid 0.2 track 0.5, remove dead copper, pour order 36): 102.725,62 100.525,59.8 95.75,59.8 95.325,60.225 95.325,67.75 95.775,68.2 97.275,68.2 99.725,65.75 99.725,64.95 100.45,64.225 104.15,64.225 104.15,63.425 104.15,62
NetDA2_4 on Top Layer "NETDA2_4_L01_P038" (hatched 90Degree grid 0.2 track 0.5, remove dead copper, pour order 38): 109.725,69.9 108.975,70.65 108.975,71.575 109.425,72.025 111.75,72.025 112.075,71.7 112.075,69.3 111.075,68.3 110.15,68.3 110.15,68.325 109.725,68.75
+3V3 on Top Layer "+3V3_L01_P040" (hatched 90Degree grid 0.2 track 0.5, remove dead copper, pour order 40): 101.875,86.25 101.375,86.75 100.4,86.75 99.2,85.55 99.2,82.025 99.6,81.625 101.525,81.625 101.875,81.975
NetDA1_1 on Top Layer "NETDA1_1_L01_P042" (hatched 90Degree grid 0.2 track 0.5, remove dead copper, pour order 42): 89.925,60.35 89.925,56.15 88.725,54.95 88.725,52.675 89.125,52.275 92.325,52.275 93.225,53.175 93.225,54.575 91.45,56.35 91.45,60.35
GND on Bottom Layer "GND_L02_P048" (hatched 90Degree grid 0.2 track 0.5, remove dead copper, pour order 48): 80.518,119.641 123.518,119.641 123.518,48.641 80.518,48.641
VIN_F on Bottom Layer "VIN_F_L02_P028" (hatched 90Degree grid 0.2 track 0.5, remove dead copper, pour order 28): 94.425,57.9 93.8,57.275 93.8,53.75 94.35,53.2 95.775,53.2 96.475,53.9 99.1,53.9 99.525,54.325 99.525,55.625 99.125,56.025 98.575,56.025 98.125,56.475 98.125,57.4 97.625,57.9
NetDA1_1 on Bottom Layer "NETDA1_1_L02_P032" (hatched 90Degree grid 0.2 track 0.5, remove dead copper, pour order 32): 89.6,57.725 88.35,56.475 88.35,55.15 90.225,53.275 93.275,53.275 93.775,53.775 93.775,57.35 93.4,57.725
NetC13_2 on Bottom Layer "NETC13_2_L02_P044" (hatched 90Degree grid 0.2 track 0.5, remove dead copper, pour order 44): 112.45,56.225 113.225,57 119.775,57 120.525,56.25 120.525,54.2 120.275,53.95 118.05,53.95 116.525,52.425 115.5,52.425 113.65,50.575 108.55,50.575 106.616,48.641 104.509,48.641 102.75,50.4 102.75,53.875 103.825,54.95 107.25,54.95 108.925,53.275 111.3,53.275 112.45,54.425

## Keep-outs
Keep-Out Layer:
  the board outline again, w0.2

## Other copper
Top Layer:
  pour cut-out: 108.45,76.6 109.825,76.6 109.825,73.95 108.45,73.95
  pour cut-out: 108.475,79.725 109.85,79.725 109.85,77.075 108.475,77.075
  pour cut-out: 93.125,68 95.5,68 95.5,59.875 93.125,59.875
  pour cut-out: 99.75,119.641 111.2,119.641 111.2,116.4 118.75,108.85 118.75,91.875 117.825,90.95 111.65,90.95 106.6,95.775 99.75,95.775 99.75,100.475
Bottom Layer:
  pour cut-out: 111.325,87.3 112.7,87.3 112.7,84.65 111.325,84.65
  pour cut-out: 111.325,90.45 112.7,90.45 112.7,87.8 111.325,87.8
  pour cut-out: 99.75,119.641 111.2,119.641 111.2,116.4 118.75,108.85 118.75,91.875 118.75,90.45 112.013,90.45 106.35,95.675 99.75,95.675 99.75,100.475

## Silkscreen, mask and mechanical layers (free items; w line width, h text height)
Top Overlay:
  lines w0.2: 97.325,59.8 98.6,59.8 ; 97.95,59.2 97.95,60.4 ; 101.475,60.45 102.425,60.45 ; 101.975,59.95 101.975,60.9 ; 107.975,90.4 108.425,90.85 108.575,90.85
  text "ISP" at 94.675,88.85 h1
  text "RST" at 100.225,88.85 h1
  text "PROG" at 83.375,88.3 h1
  text "120E" at 112.65,83.475 h0.8
  text "RL02" at 81.95,70.1 h2
Mechanical 1:
  lines w0.002: 108.343,59.216 127.543,59.216 ; 113.218,58.841 113.218,62.891 113.218,64.391 113.218,68.441 113.218,72.491 113.218,73.991 113.218,78.041 ; 113.218,98.091 113.218,99.591 113.218,112.641 ; 125.718,62.891 125.718,64.391 ; 125.718,72.491 125.718,73.991 ; 125.718,98.091 125.718,99.591 ; 120.518,50.141 120.518,53.141 125.718,53.141 cw(c125.718,51.641) 125.718,50.141 120.518,50.141
  lines w0.1: 113.218,58.841 125.718,58.841 125.718,62.891 113.218,62.891 ; 113.218,64.391 125.718,64.391 125.718,68.441 ; 113.218,68.441 125.718,68.441 ; 113.218,72.491 125.718,72.491 125.718,68.441 ; 113.218,73.991 125.718,73.991 125.718,78.041 113.218,78.041 ; 113.218,99.591 125.718,99.591 125.718,112.641 113.218,112.641 ; 123.518,57.642 113.518,57.642 cw(c113.518,58.642) 112.518,58.642 112.518,78.24 cw(c113.518,78.24) 113.518,79.24 123.518,79.24 ; 123.518,58.342 113.518,58.342 cw(c113.518,58.642) 113.218,58.642 113.218,78.24 cw(c113.518,78.24) 113.518,78.54 123.518,78.54 ; 123.518,83.842 113.518,83.842 cw(c113.518,84.842) 112.518,84.842 112.518,112.84 cw(c113.518,112.84) 113.518,113.84 123.518,113.84 ; 123.518,84.542 113.518,84.542 cw(c113.518,84.842) 113.218,84.842 113.218,112.84 cw(c113.518,112.84) 113.518,113.14 123.518,113.14 ; 113.218,85.041 113.218,98.091 125.718,98.091 125.718,85.041 113.218,85.041
Mechanical 2:
  lines w0.1: 118.15,47.15 118.725,47.725 118.725,47.75 ; 118.725,44.8 118.725,47.75 ; 119.325,47.15 118.725,47.75 ; 146.025,63.875 145.675,64.225 ; 146.125,64.7 145.65,64.225 ; 148.25,64.225 145.65,64.225 ; 118.725,47.75 118.725,47.75 ; 145.65,64.225 145.65,64.225 ; 145.65,64.225 145.675,64.225 ; 145.675,64.225 145.675,64.225 ; 143.85,63.6 144.6,63.6 ccw(c144.627,64.025) 144.6,64.45 143.85,64.45 143.85,63.6
  lines w0.2: 142.475,59.525 142.475,60.7 142.475,64 143.825,64 ; 133.525,60.525 133.525,61.8 143.825,61.8 143.825,60.525 133.525,60.525
  text "Монтаж VD8" at 131.375,73.225 h3
  text "Монтаж производить" at 129.6,71.325 h2
  text "в сторону края платы B" at 129,69.125 h2
  text "A" at 138.6,64.9 h1.52
  text "B" at 146.85,64.875 h1.52
  text "B" at 124.225,51.825 h1.52
  text "A" at 119.95,45.075 h1.52
  text "TOP" at 95.375,40.975 h5
Mechanical 3:
  text "BOT" at 108.6,41.075 h5

## Dimensions
142.475,64 to 143.825,61.8 on Mechanical 2
143.825,61.8 to 145.053,64.025 on Mechanical 2